# Altium PCB Calisma.PcbDoc
Units mil, origin at the board's own origin, x right, y up, seen from the top; angles counter-clockwise.
Board outline 2000 x 1500 mil, 2 copper layers (Top Layer, Bottom Layer); 63 components, 60 nets, 213 pads, 0 vias.
Unrouted connection lines stored in the file: 124.
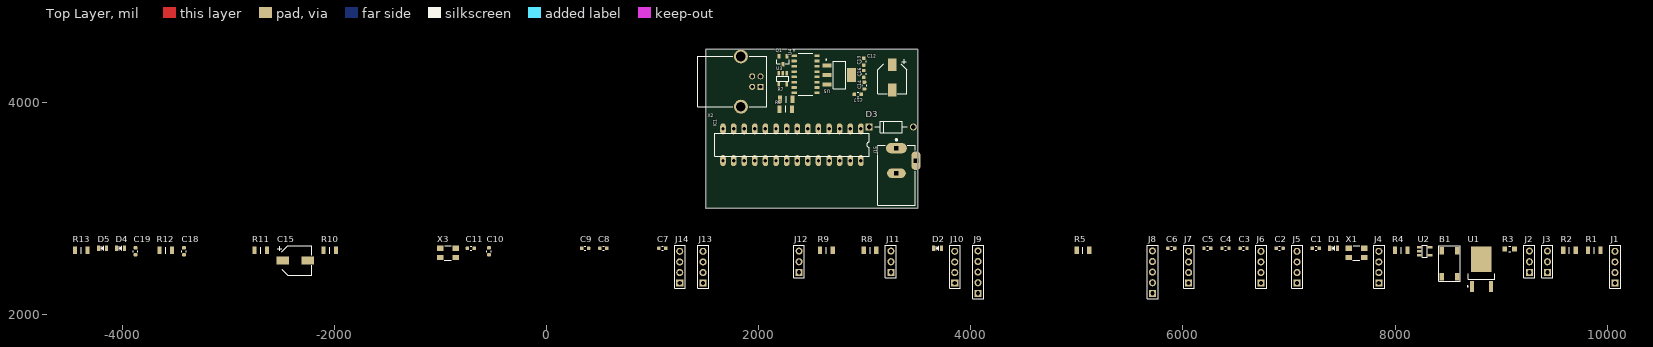
[diagram p0: Top Layer view]
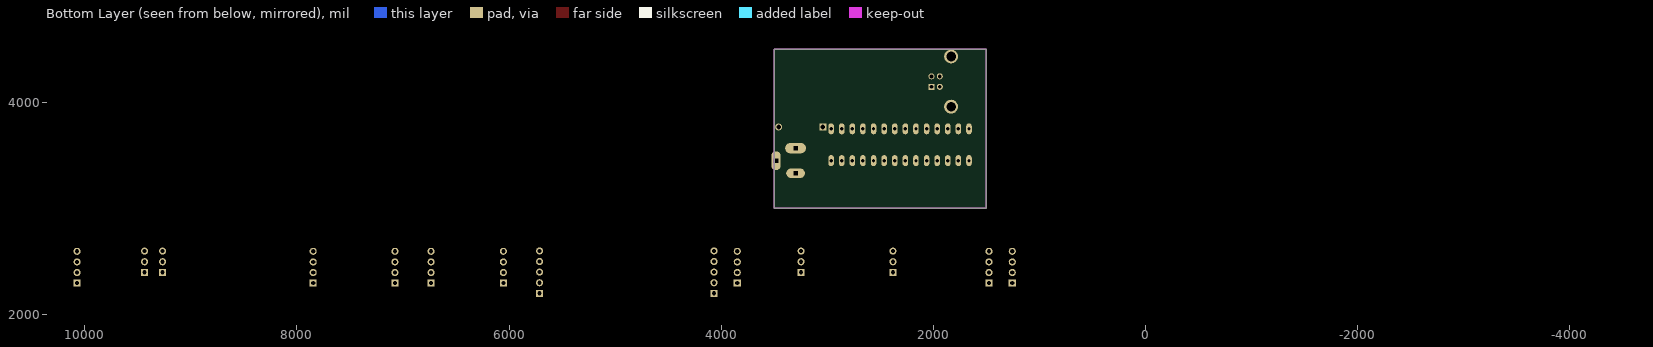
[diagram p1: Bottom Layer view, seen from below]

## Layer stack, top to bottom
Top Solder: solder mask 0.4, Solder Resist, Dk 3.5
Top Layer: signal copper 1.4
Dielectric 1: dielectric 12.6, FR-4, Dk 4.8
Bottom Layer: signal copper 1.4
Bottom Solder: solder mask 0.4, Solder Resist, Dk 3.5

## Board outline
1500,3000 3500,3000 3500,4500 1500,4500

## Design rules (kind name [scope] priority, off if disabled: settings)
Clearance [All] p1: gap=10 ignorepadtopadclearanceinfootprint=FALSE except(0: Arc-Hole Track-Hole SMDPad-Hole THPad-Hole Via-Hole Fill-Hole Poly-Hole Region-Hole Text-Hole)
PolygonConnect [All] p1: connectstyle=Relief reliefconductorwidth=10 reliefentries=4 polygonreliefangle="90 Angle" airgapwidth=10
RoutingVias [All] p1: holewidth=28 width=50 viastyle="Through Hole" minholewidth=28 minwidth=50 maxholewidth=28 maxwidth=50
SolderMaskExpansion [All] p1: expansion=4 istentingtop=FALSE
Width [All] p1: maxlimit=10 minlimit=10 preferedwidth=10
30 further rules are at their usual default settings.

## Components (designator, comment, footprint, x,y, rotation, side; value= is the part's Value field where it differs from the comment)
B1 "Push Button" "PUSB BUTTON-SMD" 8441.17,2356.55 r90 top
C1 "CL10C470JB8NNNC" SAMSUNG_CAP_0603_090 7252.17,2624.55 r0 top
C2 "CL10C470JB8NNNC" SAMSUNG_CAP_0603_090 6912.17,2624.55 r0 top
C3 "CL10C470JB8NNNC" SAMSUNG_CAP_0603_090 6571.17,2624.55 r0 top
C4 "CL10C470JB8NNNC" SAMSUNG_CAP_0603_090 6401.17,2624.55 r0 top
C5 "CL10C470JB8NNNC" SAMSUNG_CAP_0603_090 6230.17,2624.55 r0 top
C6 "CL10C470JB8NNNC" SAMSUNG_CAP_0603_090 5890.17,2624.55 r0 top
C7 "CL10C470JB8NNNC" SAMSUNG_CAP_0603_090 1091.17,2624.55 r0 top
C8 "CL10C470JB8NNNC" SAMSUNG_CAP_0603_090 534.17,2624.55 r0 top
C9 "CL10C010BB8NNNC" SAMSUNG_CAP_0603_090 363.17,2624.55 r0 top
C10 "CL10C470JB8NNNC" SAMSUNG_CAP_0603_090 -543.83,2595.55 r90 top
C11 "CL10C470JB8NNNC" SAMSUNG_CAP_0603_090 -714.83,2624.55 r0 top
C12 "EEV686M035A9HAA" CAP_EEVseries 3258,4235 r270 top
C13 "CL10C470JB8NNNC" SAMSUNG_CAP_0603_090 2991,4384 r90 top
C14 "CL10C470JB8NNNC" SAMSUNG_CAP_0603_090 2996,4159 r90 top
C15 "EEV686M035A9HAA" CAP_EEVseries -2368.83,2509.55 r0 top
C16 "CL10C470JB8NNNC" SAMSUNG_CAP_0603_090 2991,4268 r90 top
C17 "CL10C470JB8NNNC" SAMSUNG_CAP_0603_090 2934,4076 r0 top
C18 "CL10C470JB8NNNC" SAMSUNG_CAP_0603_090 -3419.83,2595.55 r90 top
C19 "CL10C470JB8NNNC" SAMSUNG_CAP_0603_090 -3875.83,2595.55 r90 top
D1 "LH R974-LP-1" LED_RED_0805 7418.17,2623.55 r0 top
D2 "LTST-C171GKT" LED_GREEN_0805 3684.17,2623.55 r0 top
D3 "1N4007" DIOAD1060W80L520D270 3249,3768 r0 top
D4 "LTST-C171GKT" LED_GREEN_0805 -4016.83,2623.55 r0 top
D5 "LTST-C171GKT" LED_GREEN_0805 -4186.83,2623.55 r0 top
IC1 "ATMEGA328P-PN" DIL28 2313,3601 r270 top
J1 "Header 2.54 1x4" "Header 2.54 1x4" 10044.17,2315.55 r90 top
J2 "Header 2.54 1x3" "Header 2.54 1x3" 9265.17,2397.55 r90 top
J3 "Header 2.54 1x3" "Header 2.54 1x3" 9435.17,2397.55 r90 top
J4 "Header 2.54 1x4" "Header 2.54 1x4" 7818.17,2315.55 r90 top
J5 "Header 2.54 1x4" "Header 2.54 1x4" 7047.17,2315.55 r90 top
J6 "Header 2.54 1x4" "Header 2.54 1x4" 6706.17,2315.55 r90 top
J7 "Header 2.54 1x4" "Header 2.54 1x4" 6025.17,2315.55 r90 top
J8 "Header 2.54 1x5" "Header 2.54 1x5" 5712.17,2199.55 r90 top
J9 "Header 2.54 1x5" "Header 2.54 1x5" 4067.17,2199.55 r90 top
J10 "Header 2.54 1x4" "Header 2.54 1x4" 3819.17,2315.55 r90 top
J11 "Header 2.54 1x3" "Header 2.54 1x3" 3245.17,2397.55 r90 top
J12 "Header 2.54 1x3" "Header 2.54 1x3" 2379.17,2397.55 r90 top
J13 "Header 2.54 1x4" "Header 2.54 1x4" 1446.17,2315.55 r90 top
J14 "Header 2.54 1x4" "Header 2.54 1x4" 1226.17,2315.55 r90 top
J15 "PJ-002A" CUI_PJ-002A 3298,3568.22 r270 top
Q1 "SSM3K357R,LF" SOT-23F 2228.4,4396.8 r180 top
R1 "10K R1206" "R1206 Resıstor" 9876.17,2603.55 r0 top
R2 "10K R1206" "R1206 Resıstor" 9641.17,2603.55 r0 top
R3 "ERJS06J105V" RES_ERJS06J105V 9081.17,2617.55 r0 top
R4 "1K R1206" "R1206 Resıstor" 8055.17,2603.55 r0 top
R5 "1K R1206" "R1206 Resıstor" 5054.17,2603.55 r0 top
R6 "10K R1206" "R1206 Resıstor" 2253,3937 r0 top
R7 "10K R1206" "R1206 Resıstor" 2262,4028 r180 top
R8 "1K R1206" "R1206 Resıstor" 3046.17,2603.55 r0 top
R9 "1K R1206" "R1206 Resıstor" 2635.17,2603.55 r0 top
R10 "1K R1206" "R1206 Resıstor" -2046.83,2603.55 r0 top
R11 "1K R1206" "R1206 Resıstor" -2697.83,2603.55 r0 top
R12 "1K R1206" "R1206 Resıstor" -3594.83,2603.55 r0 top
R13 "1K R1206" "R1206 Resıstor" -4389.83,2603.55 r0 top
U1 "LD108633 DPAK" DPAK228P972X230-3N 8814.17,2428.55 r90 top
U2 "OPA314AIDBVR" SOT23-5 8278.17,2595.55 r0 top
U3 "OPA314AIDBVR" SOT23-5 2227,4221.82 r270 top
U4 "CH340G" SOIC127P600X180-16N 2441,4265 r0 top
U5 "NCP1117ST50T3G" SOT230P700X180-4N 2760,4258 r0 top
X1 "ECS-160-20-30B-TR" ECS 7637.17,2580.55 r0 top
X2 "USB-B1HSB6" OST_USB-B1HSB6 1831.57,4196.21 r270 top
X3 "ECS-160-20-30B-TR" ECS -930.83,2580.55 r0 top

## Footprints (in the part's own frame and the unit in brackets; to place one, negate y for a bottom-side part, rotate by r counter-clockwise, add the part's x,y. Pads: shape width x height; smd on the part's side, far side on the other; paste and mask are expansions set on the pad)
CAP_EEVseries [mm]
  rect 3x2 smd mask+0.05: 1(-3,0) 2(3,0)
  silkscreen extent -4.35,-3.5 3.9,3.5, body extent -3.8,-3.4 3.8,3.4, height 8.01
CUI_PJ-002A [mm]
  oval 2.5x5 hole 1 square: 1(0,0)
  oval 2.25x4.5 hole 1 square: 2(6,0)
  oval 4.5x2.25 hole 1 square: 3(3,4.7)
  silkscreen extent -2.2,-4.5 13.7,4.5, body extent -0.7,-4.5 13.7,4.9, height 11
DIL28 [mil]
  oval 104x52 hole 32: 1(-150,650) 2(-150,550) 3(-150,450) 4(-150,350) 5(-150,250) 6(-150,150) 7(-150,50) 8(-150,-50) 9(-150,-150) 10(-150,-250) 11(-150,-350) 12(-150,-450) 13(-150,-550) 14(-150,-650) 15(150,-650) 16(150,-550) 17(150,-450) 18(150,-350) 19(150,-250) 20(150,-150) 21(150,-50) 22(150,50) 23(150,150) 24(150,250) 25(150,350) 26(150,450) 27(150,550) 28(150,650)
  silkscreen extent -110,-730 110,730, body extent -200,-682 200,683, height 180
DIOAD1060W80L520D270 [mm]
  round 1.65 hole 1.1: A(5.3,0)
  rect 1.65x1.65 hole 1.1: C(-5.3,0)
  silkscreen extent -3.9,-1.35 3.9,1.35, body extent -5.47,-1.35 5.47,1.35, height 2.69
DPAK228P972X230-3N [mm] "D-PAK, 3-Pads, Body 6,40x6,56mm (max), IPC Medium Density"
  rect 2.6x0.95 smd mask+0.05: 1(-4.15,2.28) 2(-4.15,-2.28)
  rect 6.2x4.9 smd mask+0.05: 3(2.35,0)
  silkscreen extent -4.27,-3.2 -1.15,3.43, body extent -2.5,-3.2 4.1,3.2, height 2.3
ECS [mm]
  rect 1.6x1.25 smd mask+0.05: 1(-1.85,-1.1) 2(1.85,-1.1) 3(1.85,1.1) 4(-1.85,1.1)
  silkscreen extent -0.9,-1.7 0.8,1.7, body extent -2.5,-1.6 2.5,1.6, height 0.85
"Header 2.54 1x3" [mm]
  rect 1.7x1.7 hole 1 mask+0.05: 1(0,-0.025)
  round 1.7 hole 1 mask+0.05: 2(2.54,-0.025) 3(5.08,-0.025)
  silkscreen extent -1.33,-1.3 6.45,1.28, body extent -1.26,-1.27 6.36,1.23, height 9.1
"Header 2.54 1x4" [mm]
  rect 1.7x1.7 hole 1 mask+0.05: 1(-0.5,-0.725)
  round 1.7 hole 1 mask+0.05: 2(2.04,-0.725) 3(4.58,-0.725) 4(7.12,-0.725)
  silkscreen extent -1.73,-2.1 8.52,0.5, body extent -1.68,-2.05 8.48,0.45, height 9.1
"Header 2.54 1x5" [mm]
  rect 1.7x1.7 hole 1 mask+0.05: 1(0,0)
  round 1.7 hole 1 mask+0.05: 2(2.54,0) 3(5.08,0) 4(7.62,0) 5(10.16,0)
  silkscreen extent -1.28,-1.37 11.48,1.2, body extent -1.25,-1.3 11.45,1.2, height 9.1
LED_GREEN_0805 [mm]
  rect 0.7x1.3 smd mask+0.05: 1(-0.95,0) 2(0.95,0)
  silkscreen extent -0.3,-0.6 0.3,0.6, body extent -1.01,-0.62 1.01,0.62, height 1.1
LED_RED_0805 [mm]
  rect 0.7x1.3 smd mask+0.05: 1(-0.95,0) 2(0.95,0)
  silkscreen extent -0.3,-0.6 0.3,0.6, body extent -1.01,-0.63 1.01,0.62, height 1.1
OST_USB-B1HSB6 [mm]
  rect 1.428x1.428 hole 0.92: 1(1.25,4.71)
  round 1.428 hole 0.92: 2(-1.25,4.71) 3(-1.25,2.71) 4(1.25,2.71)
  round 3.346 hole 2.33: P1(-6.02,0) P2(6.02,0)
  silkscreen extent -6.05,-10.3 6.05,6.2, body extent -7.42,-8.25 7.42,8.25, height 10.9
"PUSB BUTTON-SMD" [mm]
  rect 1.8x1.1 smd mask+0.05: 1(0,0) 2(6.2,0) 3(0,-3.7) 4(6.2,-3.7)
  silkscreen extent -1.15,-4.4 7.35,0.75, body extent -0.2,-4.5 6.2,0.7, height 1.5
"R1206 Resıstor" [mm]
  rect 1x1.8 smd mask+0.05: 1(-1.425,0) 2(1.575,0)
  silkscreen extent 0.08,-0.8 0.08,0.81, body extent -1.52,-0.8 1.68,0.81, height 0.55
RES_ERJS06J105V [mm]
  rect 1.15x1.15 smd: 1(-1.175,0) 2(1.175,0)
  silkscreen extent -0.28,-0.63 0.28,0.63, body extent -1,-0.63 1,0.63, height 0.6
SAMSUNG_CAP_0603_090 [mm]
  rrect50% 0.8x0.9 smd paste+0 mask+0.04: 1(-0.825,0) 2(0.825,0)
  silkscreen extent -0.18,-0.53 0.18,0.53, body extent -0.8,-0.41 0.8,0.41, height 0.81
SOIC127P600X180-16N [mm]
  rrect25% 1.31x0.62 smd: 1(-2.75,4.445) 2(-2.75,3.175) 3(-2.75,1.905) 4(-2.75,0.635) 5(-2.75,-0.635) 6(-2.75,-1.905) 7(-2.75,-3.175) 8(-2.75,-4.445) 9(2.75,-4.445) 10(2.75,-3.175) 11(2.75,-1.905) 12(2.75,-0.635) 13(2.75,0.635) 14(2.75,1.905) 15(2.75,3.175) 16(2.75,4.445)
  silkscreen extent -2.85,-5 1.78,5.85, body extent -3,-5 3,5, height 1.8
SOT23-5 [mm]
  rect 1.1x0.6 smd mask+0.05: 1(-1.3,0.95) 2(-1.3,0) 3(-1.3,-0.95) 4(1.3,-0.95) 5(1.3,0.95)
  silkscreen extent -0.6,-1.4 0.6,1.4, body extent -1.4,-1.45 1.4,1.45, height 1.45
SOT230P700X180-4N [mm]
  rect 2.15x1 smd: 1(-2.9,2.3) 2(-2.9,0) 3(-2.9,-2.3)
  rect 2.15x3.25 smd: 4(2.9,0)
  silkscreen extent -3.3,-3.25 1.5,3.81, body extent -3.5,-3.25 3.5,3.25, height 1.8
SOT-23F [mm]
  rect 0.8x1.1 smd mask+0.05: 1(-0.95,-0.945) 2(0.95,-0.945) 3(0,0.945)
  silkscreen extent -1.5,-0.1 1.5,0.8, body extent -1.5,-1.42 1.5,1.42, height 1.2

## Part data
B1: "Smd Push Button", Satın Alma Linki=https://urun.n11.com/diger/mini-pushbutton-switch-smd-P227461537?gclid=Cj0KCQjwkoDmBRCcARIsAG3xzl8Y_-jeD7HocNM6lvuZ_rVp83568XPGtNzlPwXWLph8oCRqo0yh87UaApZYEALw_wcB&gclsrc=aw.ds
C1 C2 C3 C4 C5 C6 C7 C8 C10 C11 C13 C14 C16 C17 C18 C19: "CAP CER 47PF 50V C0G/NP0 0603", Capacitance="47 pF", Supplier Part Number 1=1276-1037-1-ND, Supplier 1=Digi-Key, Supplier 2=Farnell, Supplier 3=Mouser, Supplier Part Number 2=3013448, Supplier Part Number 3=187-CL10C470JB8NNNC
C9: "CAP CER 1PF 50V C0G/NP0 0603", Capacitance="1 pF", Supplier Part Number 1=1276-1095-1-ND, Supplier 1=Digi-Key, Supplier 2="Arrow Electronics", Supplier Part Number 2=CL10C010BB8NNNC
C12 C15: library part "CAP ALU 68uF", "Cap Aluminum Lytic 68uF 35V 20% (6.3 X 7.7mm) SMD 280mA 2000h 105C T/R", Capacitance=68uF, Case/Package=Radial, Manufacturer=KEMET, Max Operating Temperature=105°C, Min Operating Temperature=-40°C, Package Quantity=1, Ripple Current=196mA, Supplier Part Number 1=399-6722-1-ND, Tolerance=20%, Voltage Rating=35V, Category="Aluminum Electrolytic Capacitors", ComponentLink1Description=https://datasheet.ciiva.com/5365/kem-a4002-eev-535332-5365784.pdf?src-supplier=Mouser, ComponentLink1URL=https://datasheet.ciiva.com/5365/kem-a4002-eev-535332-5365784.pdf?src-supplier=Mouser, Designator by=BERK, Height - Seated (Max)=0.315inch, Length=7.7mm, Life (Hours)=2000Hour, Manufacturer Part Number=EEV686M035A9HAA, Mount="Surface Mount", Packaging="Tape and Reel", Pricing 1="1=0,54000, 10=0,38000, 50=0,28740, 100=0,25040, 500=0,18546 (USD)", RoHS=Yes, RoHS Compliant=Yes, Series=EEV, Stock 1=543, Supplier 1=Digi-Key, Termination=SMD/SMT, Voltage Rating (DC)=35V, Impedance=340mR
D1: library part "LED RED 0805", "LED Uni-Color Hyper Red 660nm 2-Pin Chip 0805(2012Metric) T/R", Case Code (Metric)=2012, Case Code (Imperial)=0805, Color=Red, Forward Current=30mA, Forward Voltage=1.8V, Lens Color=White, Manufacturer="Osram Opto", Max Operating Temperature=85°C, Min Operating Temperature=-30°C, Package Quantity=1, Reverse Voltage=5V, Supplier Part Number 1=475-1415-1-ND, Test Current=20mA, Case/Package=0805, Category=LEDs, ComponentLink1Description=http://www.jameco.com/Jameco/Products/ProdDS/2085634.pdf?src-supplier=Jameco, ComponentLink1URL=http://www.jameco.com/Jameco/Products/ProdDS/2085634.pdf?src-supplier=Jameco, ComponentLink2Description=http://components.arrow.com/part/dataview/0323_01825492?src-supplier=Arrow+Europe, ComponentLink2URL=http://components.arrow.com/part/dataview/0323_01825492?src-supplier=Arrow+Europe, ComponentLink3Description=https://dammedia.osram.info/media/resource/hires/osram-dam-2493888/LH%20R974.pdf?src-supplier=Digi-Key, ComponentLink3URL=https://dammedia.osram.info/media/resource/hires/osram-dam-2493888/LH%20R974.pdf?src-supplier=Digi-Key, ComponentLink4Description=http://www.mouser.com/ds/2/311/LH%20R974%20-%20CHIPLED%200805-318659.pdf?src-supplier=Mouser, ComponentLink4URL=http://www.mouser.com/ds/2/311/LH%20R974%20-%20CHIPLED%200805-318659.pdf?src-supplier=Mouser, ComponentLink5Description=https://www.verical.com/server-webapp/html/getDatasheet?partID=258950&src-supplier=Verical, ComponentLink5URL=https://www.verical.com/server-webapp/html/getDatasheet?partID=258950&src-supplier=Verical, ComponentLink6Description=http://components.arrow.com/part/dataview/41971690S1077610N9133?src-supplier=Arrow+Electronics, ComponentLink6URL=http://components.arrow.com/part/dataview/41971690S1077610N9133?src-supplier=Arrow+Electronics, ComponentLink7Description=http://components.arrow.com/part/dataview/41971690S6190115N2128?src-supplier=Arrow+Electronics, ComponentLink7URL=http://components.arrow.com/part/dataview/41971690S6190115N2128?src-supplier=Arrow+Electronics, Depth=1.35mm, Designed by=BERK, Dominant Wavelength=645nm, Length=2.1mm, Lens Size=1.25mm, Lens Style=Diffused,Flat,Colorless, Lens Transparency=Diffused, Luminous Flux=0.17lm, Luminous Intensity=71mcd, Manufacturer Part Number="LH R974-LP-1", Mount="Surface Mount", Number of Elements=1, Number of Pins=2, Packaging="Tape and Reel", Pricing 1="1=0,26000, 10=0,13900, 100=0,06480, 500=0,05978, 1000=0,04683, 2000=0,04584 (USD)", Radiation Hardening=No, RoHS=Yes, RoHS Compliant=Yes, Series=CHipLED, Stock 1=35632, Supplier 1=Digi-Key, Viewing Angle=160°, Width=1.25mm, Illumination Color=Red
D2 D4 D5: library part "LED GREEN 0805", "Green 0805 130 º Min 5 mcd Typical 12 mcd Water Clear Lens SMT LED", Case Code (Metric)=2012, Case Code (Imperial)=0805, Color=Green, Forward Current=30mA, Forward Voltage=2.1V, Lens Color=Colorless, Manufacturer="Vishay Lite-On", Max Operating Temperature=85°C, Min Operating Temperature=-55°C, Package Quantity=1, Power Dissipation=100mW, Reverse Voltage=5V, Supplier Part Number 1=160-1423-1-ND, Test Current=10mA, Case/Package=0805, Category=LEDs, ComponentLink1Description=https://datasheet.ciiva.com/2110/ltst-c171gkt-2110000.pdf?src-supplier=Digi-Key, ComponentLink1URL=https://datasheet.ciiva.com/2110/ltst-c171gkt-2110000.pdf?src-supplier=Digi-Key, ComponentLink2Description=https://datasheet.ciiva.com/11773/0900766b80dc0296-11773991.pdf?src-supplier=RSComponents, ComponentLink2URL=https://datasheet.ciiva.com/11773/0900766b80dc0296-11773991.pdf?src-supplier=RSComponents, ComponentLink3Description=https://datasheet.ciiva.com/12400/lite-on-ltst-c171gkt-190133-12400647.pdf?src-supplier=Mouser, ComponentLink3URL=https://datasheet.ciiva.com/12400/lite-on-ltst-c171gkt-190133-12400647.pdf?src-supplier=Mouser, ComponentLink4Description=https://datasheet.ciiva.com/2110/ltst-c171gkt-2110001.pdf?src-supplier=Digi-Key, ComponentLink4URL=https://datasheet.ciiva.com/2110/ltst-c171gkt-2110001.pdf?src-supplier=Digi-Key, ComponentLink5Description=https://datasheet.ciiva.com/2110/ltst-c171gkt-2110002.pdf?src-supplier=Digi-Key, ComponentLink5URL=https://datasheet.ciiva.com/2110/ltst-c171gkt-2110002.pdf?src-supplier=Digi-Key, ComponentLink6Description=https://datasheet.ciiva.com/16396/ltst-c171gkt-16396549.pdf?src-supplier=Future+Electronics, ComponentLink6URL=https://datasheet.ciiva.com/16396/ltst-c171gkt-16396549.pdf?src-supplier=Future+Electronics, Depth=1.25mm, Designed by=BERK, Dominant Wavelength=569nm, Height=0.8mm, Lead Free="Lead Free", Length=2mm, Lens Style=Diffused,Colorless,Rectangular,Clear, Lens Transparency=Clear, Luminous Intensity=12mcd, Manufacturer Part Number=LTST-C171GKT, Mount="Surface Mount", Number of Elements=1, Number of LEDs=1, Number of Pins=2, Packaging="Tape and Reel", Power Rating=100mW, Pricing 1="1=0,26000, 10=0,14100, 100=0,06560, 500=0,06060, 1000=0,04747 (USD)", Radiation Hardening=No, RoHS=Yes, RoHS Compliant=Yes, Series="CHIPLED 0805", Stock 1=159023, Supplier 1=Digi-Key, Viewing Angle=130°, Wavelength=585nm, Width=1.25mm, Illumination Color=Green
D3: "Diode Switching 1KV 1A 2-Pin DO-41", Package=None, Availability=Unavailable, MF="{'manufacturer': u'ON Semiconductor'}", MP=1N4007, Price=None
IC1: "Atmel ATmega48/88/168/328 AVR Microcontroller", Package=None, Availability=Unavailable, MF="{'manufacturer': u'Microchip'}", MP=ATMEGA328P-PN, Price=None
J15: "2.0 mm Center Pin, 2.5 A, Right Angle, Through Hole, Dc Power Jack Connector", Package=None, Availability=Unavailable, MF="{'manufacturer': u'CUI Devices'}", MP=PJ-002A, Price=None
Q1: "X34 SMALL LOW ON RESISTANCE MOSF", Case/Package=SOT-23F, Manufacturer=Toshiba, Supplier Part Number 1=SSM3K357RLFCT-ND, ComponentLink1Description=https://toshiba.semicon-storage.com/info/docget.jsp?did=59207&prodName=SSM3K357R&src-supplier=Digi-Key, ComponentLink1URL=https://toshiba.semicon-storage.com/info/docget.jsp?did=59207&prodName=SSM3K357R&src-supplier=Digi-Key, Designed by=BERK, Manufacturer Part Number=SSM3K357R,LF, Pricing 1="1=0,41000, 10=0,32200, 25=0,30760, 100=0,19300, 500=0,17876, 1000=0,12155 (USD)", RoHS=No, Stock 1=4170, Supplier 1=Digi-Key
R3 U4: Package=None, Availability=Unavailable, Price=None
  R3: MF="{'manufacturer': u'Panasonic'}", MP=ERJS06J105V
  U4: MF="{'manufacturer': u'WCH'}", MP=CH340G
U1: "LD1086 3.3V REGULATOR"
U2 U3: library part OPA314, "Op Amp OPA314", Case/Package=SOT-23-5, Manufacturer="Texas Instruments", Max Dual Supply Voltage=2.75V, Max Operating Temperature=125°C, Max Supply Voltage=5.5V, Max I/O Voltage=2.5mV, Min Dual Supply Voltage=900mV, Min Operating Temperature=-40°C, Min Supply Voltage=1.8V, Nominal Supply Current=150uA, Output Current=20mA, Package Quantity=1, Power Supply Rejection Ratio (PSRR)=78dB, Supplier Part Number 1=296-36699-1-ND, Voltage Gain=128dB, Input Bias Current=10pA, Amplifier Type="GENERAL PURPOSE", Category="Amplifiers - Op Amps, Buffer, Instrumentation", Common Mode Rejection Ratio=75dB, ComponentLink1Description=https://datasheet.ciiva.com/14462/opa2314-14462006.pdf?src-supplier=Avnet, ComponentLink1URL=https://datasheet.ciiva.com/14462/opa2314-14462006.pdf?src-supplier=Avnet, ComponentLink2Description=https://datasheet.ciiva.com/26226/opa2314-26226295.pdf?src-supplier=Avnet+Europe, ComponentLink2URL=https://datasheet.ciiva.com/26226/opa2314-26226295.pdf?src-supplier=Avnet+Europe, ComponentLink3Description=https://datasheet.ciiva.com/14456/opa2314-14456281.pdf?src-supplier=Avnet, ComponentLink3URL=https://datasheet.ciiva.com/14456/opa2314-14456281.pdf?src-supplier=Avnet, ComponentLink4Description=https://datasheet.ciiva.com/29638/opa314-29638827.pdf?src-supplier=Digi-Key, ComponentLink4URL=https://datasheet.ciiva.com/29638/opa314-29638827.pdf?src-supplier=Digi-Key, Contact Plating=Gold, Designed by=BERK, Gain Bandwidth Product=3MHz, Lead Free="Lead Free", Manufacturer Part Number=OPA314AIDBVR, Nominal Gain Bandwidth Product=3MHz, Number of Channels=1, Number of Circuits=1, Number of Elements=1, Number of Pins=5, Operating Supply Current=150uA, Output Current per Channel=20mA, Packaging="Tape and Reel", Pricing 1="1=1,06000, 10=0,95100, 25=0,90240, 100=0,69280, 250=0,61224, 500=0,58004, 1000=0,45114 (USD)", Radiation Hardening=No, RoHS=Yes, RoHS Compliant=Yes, Series=-, Slew Rate=1.5V/µs, Stock 1=964, Supplier 1=Digi-Key, Supply Current=150uA, Technology=CMOS, Unity Gain Bandwidth Product=3MHz, Input Offset Voltage (Vos)=2.5mV
U5: "1.0 A Low-Dropout Positive ,Fixed and Adjustable,Voltage Regulators", Package=None, Availability=Unavailable, MF="{'manufacturer': u'ON Semiconductor'}", MP=NCP1117ST50T3G, Price=None
X1 X3: library part "CRYSTAL 16MHz", "CRYSTAL 16.0000MHZ 20PF SMD", Case/Package=SMD/SMT, ESR (Equivalent Series Resistance)=50R, Frequency=16MHz, Frequency Stability=50ppm, Frequency Tolerance=30ppm, Load Capacitance=20pF, Manufacturer="ECS International", Max Operating Temperature=70°C, Min Operating Temperature=-20°C, Package Quantity=1, Supplier Part Number 1=XC1120CT-ND, Category=Crystals, ComponentLink1Description=https://datasheet.ciiva.com/853/ecx-53b-853408.pdf?src-supplier=Digi-Key, ComponentLink1URL=https://datasheet.ciiva.com/853/ecx-53b-853408.pdf?src-supplier=Digi-Key, ComponentLink2Description=https://datasheet.ciiva.com/853/ecx-53b-853406.pdf?src-supplier=Digi-Key, ComponentLink2URL=https://datasheet.ciiva.com/853/ecx-53b-853406.pdf?src-supplier=Digi-Key, ComponentLink3Description=https://datasheet.ciiva.com/853/ecx-53b-853407.pdf?src-supplier=Digi-Key, ComponentLink3URL=https://datasheet.ciiva.com/853/ecx-53b-853407.pdf?src-supplier=Digi-Key, Designed by=BERK, Height=0.033inch, Lead Free="Lead Free", Length=0.197inch, Manufacturer Part Number=ECS-160-20-30B-TR, Mount="Surface Mount", Packaging="Tape and Reel", Pricing 1="1=1,33000, 10=1,26800, 50=1,23900, 100=1,06200, 500=1,03250 (USD)", RoHS=Yes, RoHS Compliant=Yes, Series=ECX-53B, Stock 1=15303, Supplier 1=Digi-Key, Termination=SMD/SMT, Tolerance=50ppm, Width=0.126inch
X2: "Conn Usb Type b r/a Black", Package=None, Availability=Unavailable, MF="{'manufacturer': u'On Shore'}", MP=USB-B1HSB6, Price=None

## Nets (pads, with @x,y where several pads share a name; then routed paths per layer and width w, separated by ;. In a path a pad name is that pad's centre, name@x,y a point inside that pad or via, vN(x,y) a via of type N, cw(c..) or ccw(c..) an arc to the next point about the centre after c; other vN are vias at no path point)
+3.3V: C1.2 J1.1 J1.2 J5.4 U1.3
+5V: C2.2 C8.2 C9.1 IC1.7 IC1.20 J3.3 J4.3 J5.2 J6.1 J7.3 Q1.3 R1.2 R2.2 R5.2 R10.1 R11.1 U1.2 U2.5 U3.4 U3.5 U4.4
AREF: IC1.21 J9.3
D+: U4.6 X2.3
D-: U4.5 X2.2
GND: B1.1 B1.2 C3.1 C4.1 C5.1 C6.1 C10.1 C11.1 C12.2 C15.2 C16.1 C17.1 C18.1 C19.1 D1.1 IC1.8 IC1.22 J1.3 J1.4 J3.1 J4.4 J6.2 J6.3 J7.4 J9.2 J15.2 J15.3 R7.1 U1.1 U2.2 U3.2 U5.1 X2.4
MISO: IC1.18 J2.1 J8.5
MOSI: IC1.17 J3.2 J8.4
NetC1_1: C1.1 C3.2
NetC2_1: C2.1 C4.2
NetC5_2: C5.2 X1.4
NetC6_2: C6.2 X1.2
NetC7_1: C7.1 C10.2
NetC8_1: C8.1 C11.2
NetC9_2: C9.2 U4.16
NetC12_1: C12.1 C13.2 C14.2 U5.2 U5.4
NetC13_1: C13.1 C16.2
NetC14_1: C14.1 C17.2
NetC18_2: C18.2 X3.4
NetC19_2: C19.2 X3.2
NetD1_2: D1.2 R4.2
NetD2_1: D2.1 U4.1
NetD2_2: D2.2 R5.1
NetD3_A: D3.A J15.1
NetD4_2: D4.2 R10.2
NetD5_2: D5.2 R11.2
NetJ8_1: IC1.14 J8.1
NetJ8_2: IC1.15 J8.2
NetJ8_3: IC1.16 J8.3
NetJ10_1: J10.1 U4.11
NetJ10_2: J10.2 U4.12
NetJ10_3: J10.3 U4.10
NetJ10_4: J10.4 U4.9
NetJ11_1: IC1.23 J11.1
NetJ11_2: IC1.24 J11.2
NetJ11_3: IC1.25 J11.3
NetJ12_1: IC1.26 J12.1
NetJ13_3: IC1.4 J13.3
NetJ13_4: IC1.5 J13.4
NetJ14_1: IC1.6 J14.1
NetJ14_2: IC1.11 J14.2
NetJ14_3: IC1.12 J14.3
NetJ14_4: IC1.13 J14.4
NetQ1_1: Q1.1 U3.1
NetQ1_2: Q1.2 X2.1
NetR4_1: R4.1 U2.1 U2.4
NetR6_1: R6.1 R7.2 U3.3
NetR8_1: R8.1 U4.2
NetR9_1: R9.1 U4.3
PB5: IC1.19 J2.2 J9.1 U2.3
RESET: B1.3 B1.4 IC1.1 J2.3 J5.3 R1.1 R2.1
RXD: D5.1 IC1.2 J7.1 J13.1 R9.2 R13.1 R13.2
SCL: IC1.28 J4.1 J9.5 J12.3
SDA: IC1.27 J4.2 J9.4 J12.2
TOSC1: IC1.9 R3.2 X1.1
TOSC2: IC1.10 R3.1 X1.3
TXD: D4.1 IC1.3 J7.2 J13.2 R8.2 R12.1 R12.2
VIN: C15.1 D3.C J6.4 R6.2 U5.3
X0: U4.8 X3.1
X1: U4.7 X3.3
pads on no net: C7.2 J5.1 U4.13 U4.14 U4.15 X2.P1 X2.P2

## Keep-outs
Keep-Out Layer:
  the board outline again, w10